# Altium PCB PCB.PcbDoc
Units mm, origin at the board's own origin, x right, y up, seen from the top; angles counter-clockwise.
Board outline 100 x 100 mm, 2 copper layers (Top Layer, Bottom Layer), stack 1.571 mm thick; 55 components, 12 nets, 665 pads, 33 vias.
Unrouted connection lines stored in the file: 4.
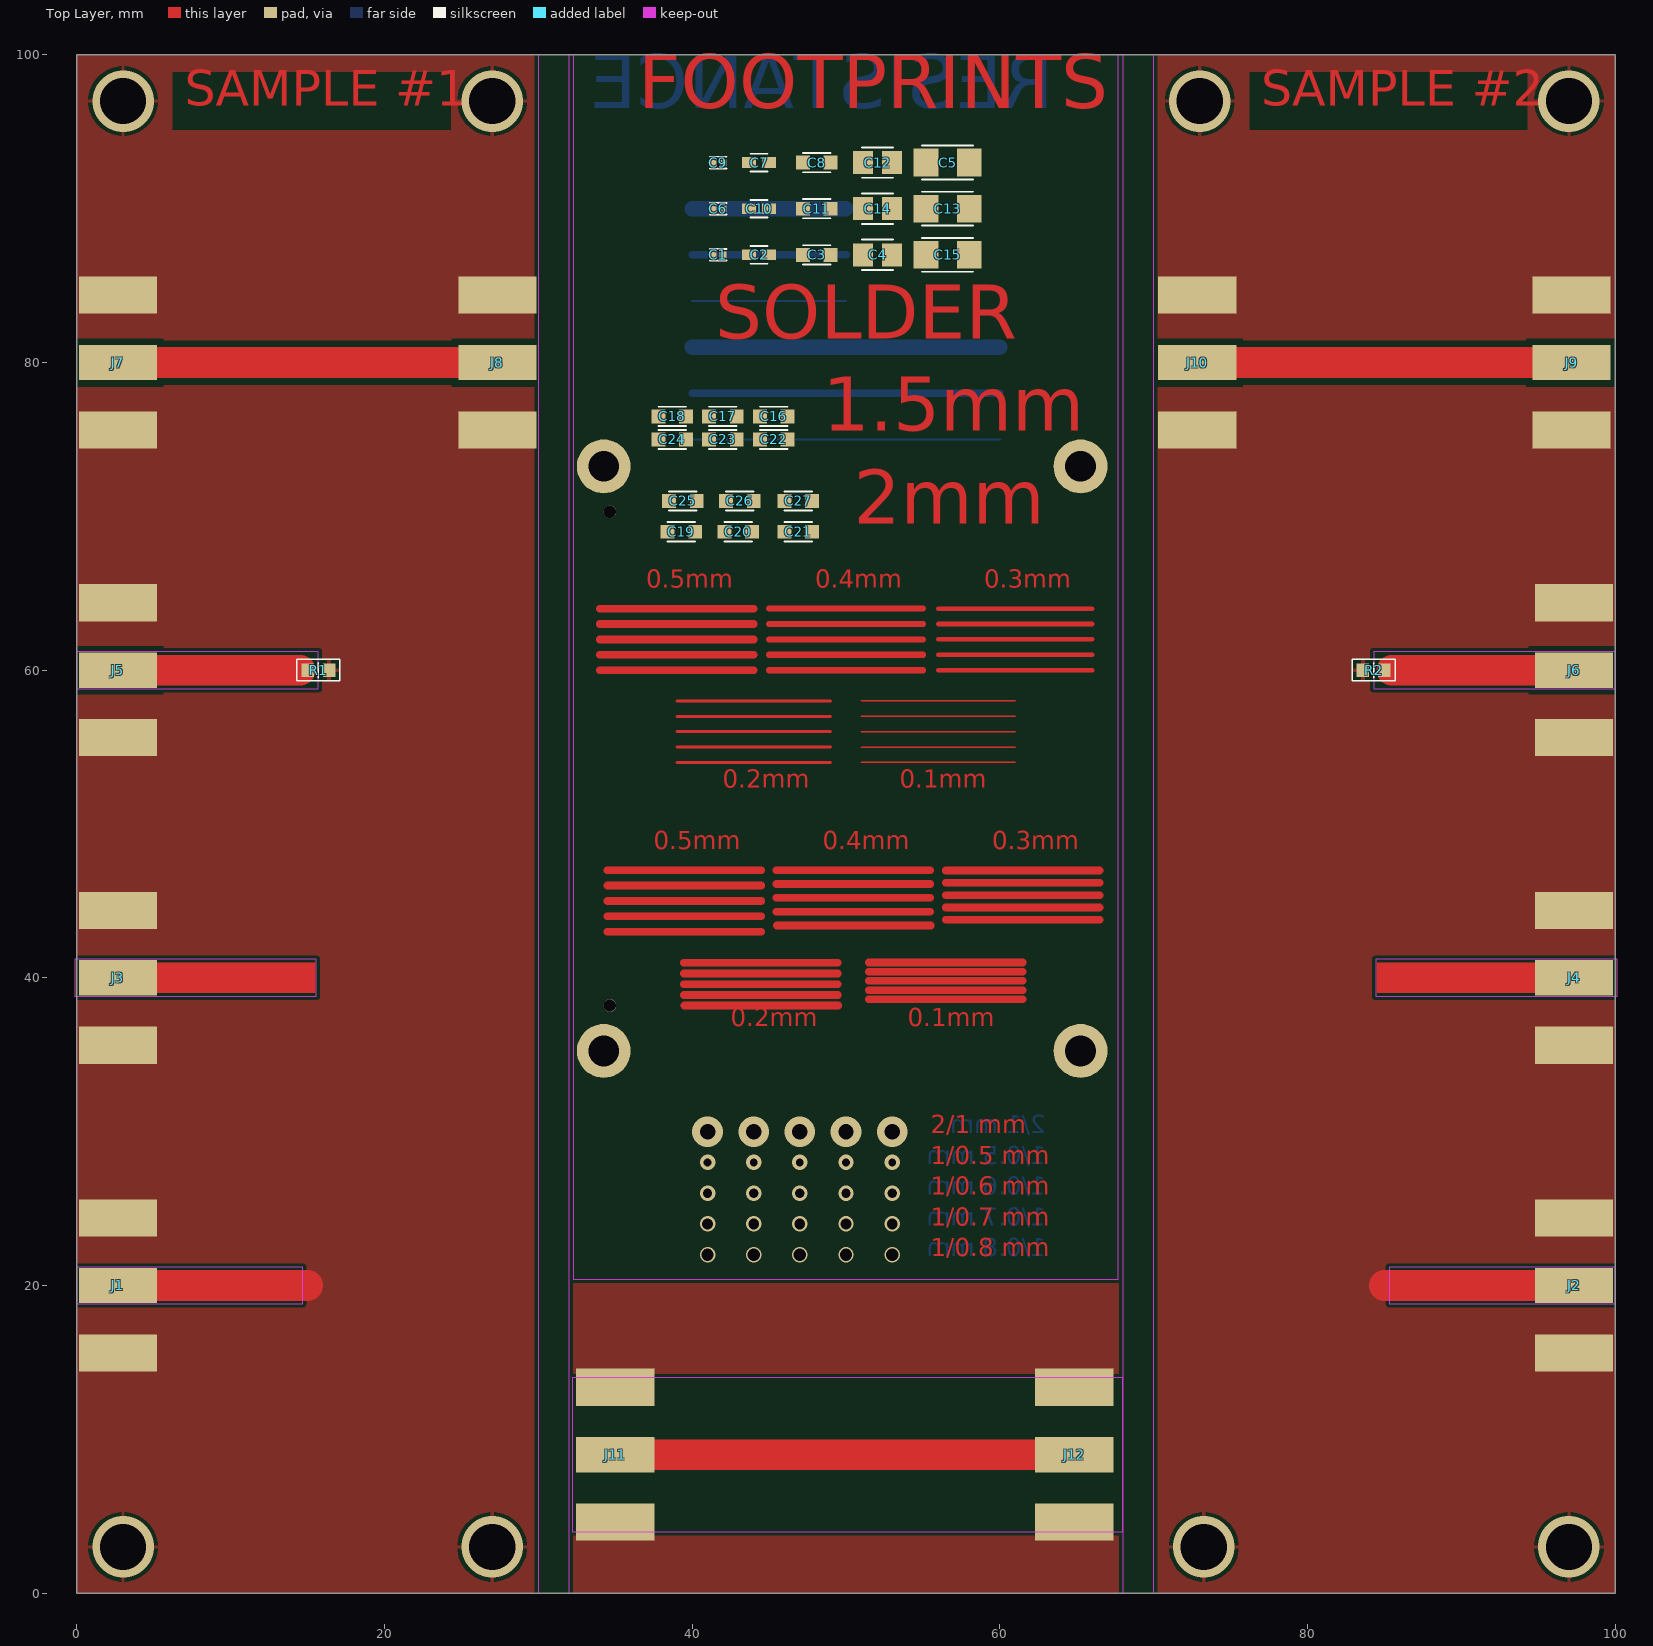
[diagram p0: Top Layer view]
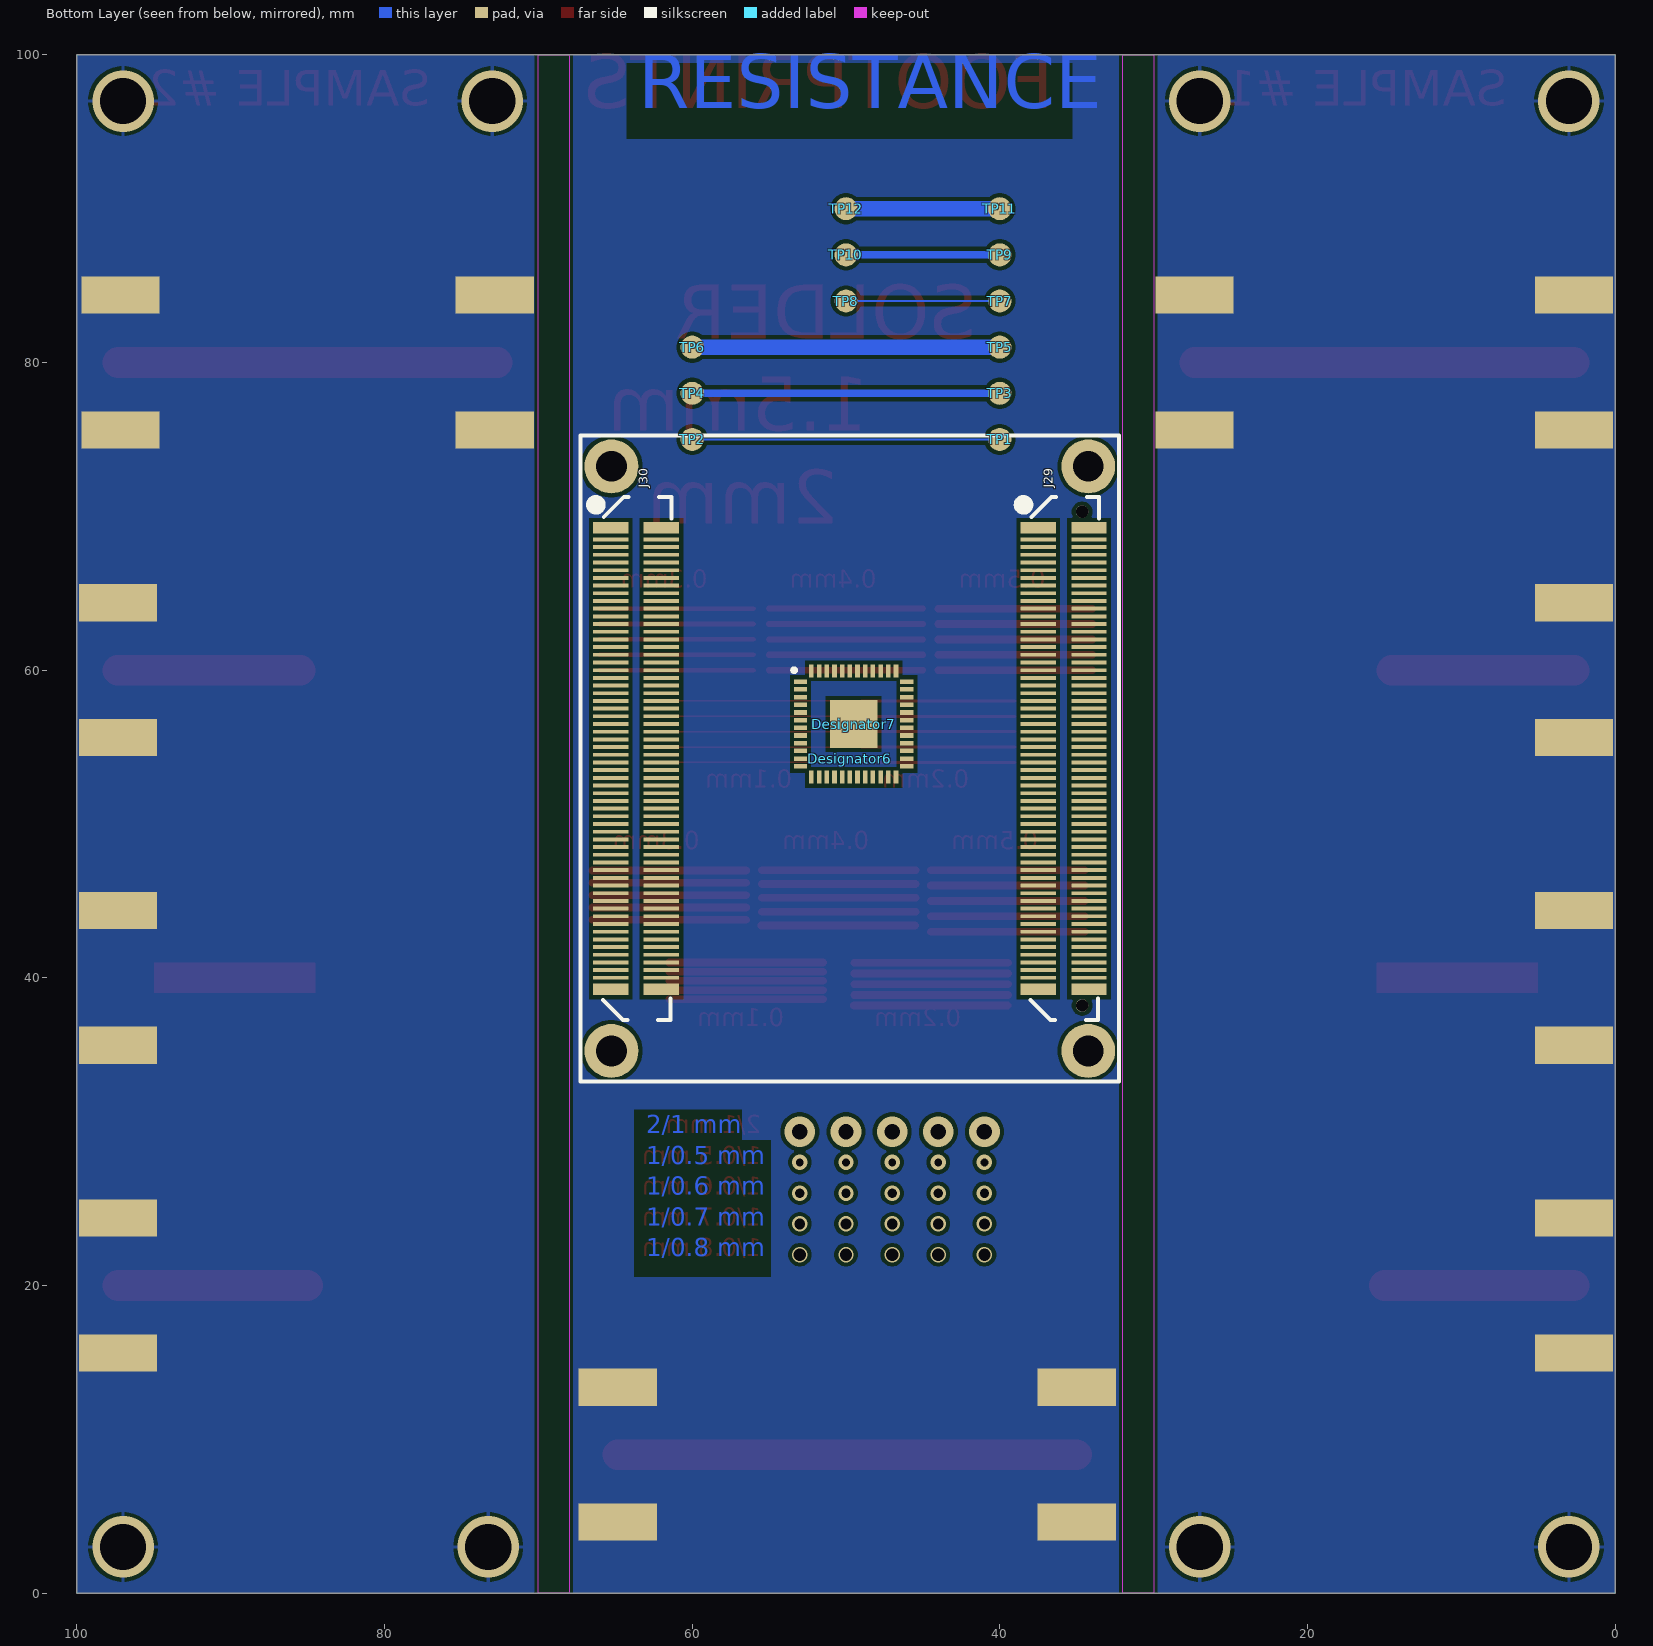
[diagram p1: Bottom Layer view, seen from below]

## Layer stack, top to bottom
Top Solder: solder mask 0.0102, Solder Resist, Dk 3.5
Top Layer: signal copper 0.0356
Core: dielectric 1.5, FR-4, Dk 4
Bottom Layer: signal copper 0.0356
Bottom Solder: solder mask 0.0102, Solder Resist, Dk 3.5

## Board outline
0,0 0,100 100,100 100,0

## Design rules (kind name [scope] priority, off if disabled: settings)
Clearance Clearance_RF [InNetClass('RF') vs InNet('GND')] p1: gap=0.45 ignorepadtopadclearanceinfootprint=FALSE
Clearance [All] p2: gap=0.254 ignorepadtopadclearanceinfootprint=FALSE
PolygonConnect PolygonConnect_RF [InNet('GND') vs HasFootprint('142-0701-851')] p1: connectstyle=Direct reliefconductorwidth=0.254 reliefentries=4 polygonreliefangle="90 Angle" airgapwidth=0.254
PolygonConnect [All] p2: connectstyle=Relief reliefconductorwidth=0.254 reliefentries=4 polygonreliefangle="90 Angle" airgapwidth=0.254
RoutingVias [All] p1: holewidth=0.711 width=1.27 viastyle="Through Hole" minholewidth=0.711 minwidth=1.27 maxholewidth=0.711 maxwidth=1.27
SolderMaskExpansion [All] p1: expansion=0.102 istentingtop=FALSE
SupplyNets "Schematic Supply Nets" [InNet('GND')] p1: voltage=0.000
Width RF [All] p1: maxlimit=2 minlimit=2 preferedwidth=2 impedanceprofiledriven=TRUE impedanceprofileid={2C32BDC9-850F-4FFA-BF8C-7C24DA79BBD3} impedanceprofilevalue=50.000000 minimp=50.000000 maximp=50.000000 favimp=50.000000
Width [All] p2: maxlimit=2 minlimit=0.254 preferedwidth=0.254 minimp=50.000000 maximp=50.000000 favimp=50.000000
30 further rules are at their usual default settings.

## Classes and differential pairs
net class RF: GND NetJ3_1 NetJ4_1 NetJ5_1 NetJ6_1 NetJ7_1 NetJ9_1 NetJ11_1

## Components (designator, comment, footprint, x,y, rotation, side; value= is the part's Value field where it differs from the comment)
C1 "C_0201" C_0201 41.67,87 r0 top
C2 "C_0402" C_0402 44.35,87 r0 top
C3 "C_0603" C_0603 48.1,87 r0 top
C4 "C_0805" C_0805 52.05,87 r0 top
C5 "C_1206" C_1206 56.6,93 r0 top
C6 "C_0201" C_0201 41.67,90 r0 top
C7 "C_0402" C_0402 44.35,93 r0 top
C8 "C_0603" C_0603 48.1,93 r0 top
C9 "C_0201" C_0201 41.67,93 r0 top
C10 "C_0402" C_0402 44.35,90 r0 top
C11 "C_0603" C_0603 48.1,90 r0 top
C12 "C_0805" C_0805 52.05,93 r0 top
C13 "C_1206" C_1206 56.6,90 r0 top
C14 "C_0805" C_0805 52.05,90 r0 top
C15 "C_1206" C_1206 56.6,87 r0 top
C16 "C_0603" C_0603 45.3,76.5 r180 top
C17 "C_0603" C_0603 42,76.5 r180 top
C18 "C_0603" C_0603 38.7,76.5 r180 top
C19 "C_0603" C_0603 39.3,69 r0 top
C20 "C_0603" C_0603 43,69 r0 top
C21 "C_0603" C_0603 46.9,69 r0 top
C22 "C_0603" C_0603 45.3,75 r180 top
C23 "C_0603" C_0603 42,75 r180 top
C24 "C_0603" C_0603 38.7,75 r180 top
C25 "C_0603" C_0603 39.4,71 r0 top
C26 "C_0603" C_0603 43.1,71 r0 top
C27 "C_0603" C_0603 46.9,71 r0 top
Designator6 "Comment" AC7Z020 65.25,35.25 r90 bottom
Designator7 "Comment" QFN50P700X700X100-49N 49.5,56.5 r180 bottom
J1 "142-0701-851" 142-0701-851 2.5,20 r90 top
J2 "142-0701-851" 142-0701-851 97.5,20 r270 top
J3 "142-0701-851" 142-0701-851 2.5,40 r90 top
J4 "142-0701-851" 142-0701-851 97.5,40 r270 top
J5 "142-0701-851" 142-0701-851 2.5,60 r90 top
J6 "142-0701-851" 142-0701-851 97.5,60 r270 top
J7 "142-0701-851" 142-0701-851 2.5,80 r90 top
J8 "142-0701-851" 142-0701-851 27.5,80 r270 top
J9 "142-0701-851" 142-0701-851 97.335,80 r270 top
J10 "142-0701-851" 142-0701-851 72.665,80 r90 top
J11 "142-0701-851" 142-0701-851 34.835,9 r90 top
J12 "142-0701-851" 142-0701-851 65,9 r270 top
R1 "50R 0603" 0603[1608] 15.7,60 r180 top
R2 "50R 0603" 0603[1608] 84.3,60 r0 top
TP1 "Single Pin Test Point" testpoint_SMD 40,75 r180 bottom
TP2 "Single Pin Test Point" testpoint_SMD 60,75 r90 bottom
TP3 "Single Pin Test Point" testpoint_SMD 40,78 r90 bottom
TP4 "Single Pin Test Point" testpoint_SMD 60,78 r90 bottom
TP5 "Single Pin Test Point" testpoint_SMD 40,81 r90 bottom
TP6 "Single Pin Test Point" testpoint_SMD 60,81 r90 bottom
TP7 "Single Pin Test Point" testpoint_SMD 40,84 r90 bottom
TP8 "Single Pin Test Point" testpoint_SMD 50,84 r90 bottom
TP9 "Single Pin Test Point" testpoint_SMD 40,87 r90 bottom
TP10 "Single Pin Test Point" testpoint_SMD 50,87 r90 bottom
TP11 "Single Pin Test Point" testpoint_SMD 40,90 r90 bottom
TP12 "Single Pin Test Point" testpoint_SMD 50,90 r90 bottom

## Footprints (in the part's own frame and the unit in brackets; to place one, negate y for a bottom-side part, rotate by r counter-clockwise, add the part's x,y. Pads: shape width x height; smd on the part's side, far side on the other; paste and mask are expansions set on the pad)
142-0701-851 [mil] "SMA - Edge Launch - Jack (Socket)"
  rect 90x200 smd paste+0 mask+0: 1(0,-6.5)
  rect 95x200 smd paste-100 mask+0: 2(-172.5,-6.5) 3(172.5,-6.5)
  rect 95x200 smd far side paste-100 mask+0: 4(-172.5,-6.5) 5(172.5,-6.5)
  body extent -188,-92 188,470, height 162
0603[1608] [mm] "Chip Capacitor, Body 1.6x0.8mm, IPC High Density"
  rect 0.8x0.9 smd: 1(-0.7,0) 2(0.7,0)
  silkscreen extent -1.4,-0.7 1.4,0.7, body extent -0.79,-0.4 0.81,0.4, height 0.45
AC7Z020 [mm]
  rect 0.75x2.3 smd paste-2.3 mask+0: 1(34,-27.75) 2(34,-31.05) 119(4,-27.75) 120(4,-31.05) 121(34,0.05) 122(34,-3.25) 239(4,0.05) 240(4,-3.25)
  rect 0.25x2.3 smd paste-2.3 mask+0: 3(33.25,-27.75) 4(33.25,-31.05) 5(32.75,-27.75) 6(32.75,-31.05) 7(32.25,-27.75) 8(32.25,-31.05) 9(31.75,-27.75) 10(31.75,-31.05) 11(31.25,-27.75) 12(31.25,-31.05) 13(30.75,-27.75) 14(30.75,-31.05) 15(30.25,-27.75) 16(30.25,-31.05) 17(29.75,-27.75) 18(29.75,-31.05) 19(29.25,-27.75) 20(29.25,-31.05) 21(28.75,-27.75) 22(28.75,-31.05) 23(28.25,-27.75) 24(28.25,-31.05) 25(27.75,-27.75) 26(27.75,-31.05) 27(27.25,-27.75) 28(27.25,-31.05) 29(26.75,-27.75) 30(26.75,-31.05) 31(26.25,-27.75) 32(26.25,-31.05) 33(25.75,-27.75) 34(25.75,-31.05) 35(25.25,-27.75) 36(25.25,-31.05) 37(24.75,-27.75) 38(24.75,-31.05) 39(24.25,-27.75) 40(24.25,-31.05) 41(23.75,-27.75) 42(23.75,-31.05) 43(23.25,-27.75) 44(23.25,-31.05) 45(22.75,-27.75) 46(22.75,-31.05) 47(22.25,-27.75) 48(22.25,-31.05) 49(21.75,-27.75) 50(21.75,-31.05) 51(21.25,-27.75) 52(21.25,-31.05) 53(20.75,-27.75) 54(20.75,-31.05) 55(20.25,-27.75) 56(20.25,-31.05) 57(19.75,-27.75) 58(19.75,-31.05) 59(19.25,-27.75) 60(19.25,-31.05) 61(18.75,-27.75) 62(18.75,-31.05) 63(18.25,-27.75) 64(18.25,-31.05) 65(17.75,-27.75) 66(17.75,-31.05) 67(17.25,-27.75) 68(17.25,-31.05) 69(16.75,-27.75) 70(16.75,-31.05) 71(16.25,-27.75) 72(16.25,-31.05) 73(15.75,-27.75) 74(15.75,-31.05) 75(15.25,-27.75) 76(15.25,-31.05) 77(14.75,-27.75) 78(14.75,-31.05) 79(14.25,-27.75) 80(14.25,-31.05) 81(13.75,-27.75) 82(13.75,-31.05) 83(13.25,-27.75) 84(13.25,-31.05) 85(12.75,-27.75) 86(12.75,-31.05) 87(12.25,-27.75) 88(12.25,-31.05) 89(11.75,-27.75) 90(11.75,-31.05) 91(11.25,-27.75) 92(11.25,-31.05) 93(10.75,-27.75) 94(10.75,-31.05) 95(10.25,-27.75) 96(10.25,-31.05) 97(9.75,-27.75) 98(9.75,-31.05) 99(9.25,-27.75) 100(9.25,-31.05) 101(8.75,-27.75) 102(8.75,-31.05) 103(8.25,-27.75) 104(8.25,-31.05) 105(7.75,-27.75) 106(7.75,-31.05) 107(7.25,-27.75) 108(7.25,-31.05) 109(6.75,-27.75) 110(6.75,-31.05) 111(6.25,-27.75) 112(6.25,-31.05) 113(5.75,-27.75) 114(5.75,-31.05) 115(5.25,-27.75) 116(5.25,-31.05) 117(4.75,-27.75) 118(4.75,-31.05) 123(33.25,0.05) 124(33.25,-3.25) 125(32.75,0.05) 126(32.75,-3.25) 127(32.25,0.05) 128(32.25,-3.25) 129(31.75,0.05) 130(31.75,-3.25) 131(31.25,0.05) 132(31.25,-3.25) 133(30.75,0.05) 134(30.75,-3.25) 135(30.25,0.05) 136(30.25,-3.25) 137(29.75,0.05) 138(29.75,-3.25) 139(29.25,0.05) 140(29.25,-3.25) 141(28.75,0.05) 142(28.75,-3.25) 143(28.25,0.05) 144(28.25,-3.25) 145(27.75,0.05) 146(27.75,-3.25) 147(27.25,0.05) 148(27.25,-3.25) 149(26.75,0.05) 150(26.75,-3.25) 151(26.25,0.05) 152(26.25,-3.25) 153(25.75,0.05) 154(25.75,-3.25) 155(25.25,0.05) 156(25.25,-3.25) 157(24.75,0.05) 158(24.75,-3.25) 159(24.25,0.05) 160(24.25,-3.25) 161(23.75,0.05) 162(23.75,-3.25) 163(23.25,0.05) 164(23.25,-3.25) 165(22.75,0.05) 166(22.75,-3.25) 167(22.25,0.05) 168(22.25,-3.25) 169(21.75,0.05) 170(21.75,-3.25) 171(21.25,0.05) 172(21.25,-3.25) 173(20.75,0.05) 174(20.75,-3.25) 175(20.25,0.05) 176(20.25,-3.25) 177(19.75,0.05) 178(19.75,-3.25) 179(19.25,0.05) 180(19.25,-3.25) 181(18.75,0.05) 182(18.75,-3.25) 183(18.25,0.05) 184(18.25,-3.25) 185(17.75,0.05) 186(17.75,-3.25) 187(17.25,0.05) 188(17.25,-3.25) 189(16.75,0.05) 190(16.75,-3.25) 191(16.25,0.05) 192(16.25,-3.25) 193(15.75,0.05) 194(15.75,-3.25) 195(15.25,0.05) 196(15.25,-3.25) 197(14.75,0.05) 198(14.75,-3.25) 199(14.25,0.05) 200(14.25,-3.25) 201(13.75,0.05) 202(13.75,-3.25) 203(13.25,0.05) 204(13.25,-3.25) 205(12.75,0.05) 206(12.75,-3.25) 207(12.25,0.05) 208(12.25,-3.25) 209(11.75,0.05) 210(11.75,-3.25) 211(11.25,0.05) 212(11.25,-3.25) 213(10.75,0.05) 214(10.75,-3.25) 215(10.25,0.05) 216(10.25,-3.25) 217(9.75,0.05) 218(9.75,-3.25) 219(9.25,0.05) 220(9.25,-3.25) 221(8.75,0.05) 222(8.75,-3.25) 223(8.25,0.05) 224(8.25,-3.25) 225(7.75,0.05) 226(7.75,-3.25) 227(7.25,0.05) 228(7.25,-3.25) 229(6.75,0.05) 230(6.75,-3.25) 231(6.25,0.05) 232(6.25,-3.25) 233(5.75,0.05) 234(5.75,-3.25) 235(5.25,0.05) 236(5.25,-3.25) 237(4.75,0.05) 238(4.75,-3.25)
  round 3.5 hole 2 paste-2539.97 mask+0: MTH(0,-31) MTH(0,0) MTH(38,-31) MTH(38,0)
  rect 0.35x1.55 on Bottom Paste mask-1.55: Un5(4.19,0.05) Un6(4.19,-3.25) Un7(4.19,-27.75) Un8(4.19,-31.05) Un241(33.81,0.05) Un242(33.81,-3.25) Un243(33.81,-27.75) Un244(33.81,-31.05)
  rect 0.23x1.55 on Bottom Paste mask-1.55: Un9(4.75,0.05) Un10(4.75,-3.25) Un11(4.75,-27.75) Un12(4.75,-31.05) Un13(5.25,0.05) Un14(5.25,-3.25) Un15(5.25,-27.75) Un16(5.25,-31.05) Un17(5.75,0.05) Un18(5.75,-3.25) Un19(5.75,-27.75) Un20(5.75,-31.05) Un21(6.25,0.05) Un22(6.25,-3.25) Un23(6.25,-27.75) Un24(6.25,-31.05) Un25(6.75,0.05) Un26(6.75,-3.25) Un27(6.75,-27.75) Un28(6.75,-31.05) Un29(7.25,0.05) Un30(7.25,-3.25) Un31(7.25,-27.75) Un32(7.25,-31.05) Un33(7.75,0.05) Un34(7.75,-3.25) Un35(7.75,-27.75) Un36(7.75,-31.05) Un37(8.25,0.05) Un38(8.25,-3.25) Un39(8.25,-27.75) Un40(8.25,-31.05) Un41(8.75,0.05) Un42(8.75,-3.25) Un43(8.75,-27.75) Un44(8.75,-31.05) Un45(9.25,0.05) Un46(9.25,-3.25) Un47(9.25,-27.75) Un48(9.25,-31.05) Un49(9.75,0.05) Un50(9.75,-3.25) Un51(9.75,-27.75) Un52(9.75,-31.05) Un53(10.25,0.05) Un54(10.25,-3.25) Un55(10.25,-27.75) Un56(10.25,-31.05) Un57(10.75,0.05) Un58(10.75,-3.25) Un59(10.75,-27.75) Un60(10.75,-31.05) Un61(11.25,0.05) Un62(11.25,-3.25) Un63(11.25,-27.75) Un64(11.25,-31.05) Un65(11.75,0.05) Un66(11.75,-3.25) Un67(11.75,-27.75) Un68(11.75,-31.05) Un69(12.25,0.05) Un70(12.25,-3.25) Un71(12.25,-27.75) Un72(12.25,-31.05) Un73(12.75,0.05) Un74(12.75,-3.25) Un75(12.75,-27.75) Un76(12.75,-31.05) Un77(13.25,0.05) Un78(13.25,-3.25) Un79(13.25,-27.75) Un80(13.25,-31.05) Un81(13.75,0.05) Un82(13.75,-3.25) Un83(13.75,-27.75) Un84(13.75,-31.05) Un85(14.25,0.05) Un86(14.25,-3.25) Un87(14.25,-27.75) Un88(14.25,-31.05) Un89(14.75,0.05) Un90(14.75,-3.25) Un91(14.75,-27.75) Un92(14.75,-31.05) Un93(15.25,0.05) Un94(15.25,-3.25) Un95(15.25,-27.75) Un96(15.25,-31.05) Un97(15.75,0.05) Un98(15.75,-3.25) Un99(15.75,-27.75) Un100(15.75,-31.05) Un101(16.25,0.05) Un102(16.25,-3.25) Un103(16.25,-27.75) Un104(16.25,-31.05) Un105(16.75,0.05) Un106(16.75,-3.25) Un107(16.75,-27.75) Un108(16.75,-31.05) Un109(17.25,0.05) Un110(17.25,-3.25) Un111(17.25,-27.75) Un112(17.25,-31.05) Un113(17.75,0.05) Un114(17.75,-3.25) Un115(17.75,-27.75) Un116(17.75,-31.05) Un117(18.25,0.05) Un118(18.25,-3.25) Un119(18.25,-27.75) Un120(18.25,-31.05) Un121(18.75,0.05) Un122(18.75,-3.25) Un123(18.75,-27.75) Un124(18.75,-31.05) Un125(19.25,0.05) Un126(19.25,-3.25) Un127(19.25,-27.75) Un128(19.25,-31.05) Un129(19.75,0.05) Un130(19.75,-3.25) Un131(19.75,-27.75) Un132(19.75,-31.05) Un133(20.25,0.05) Un134(20.25,-3.25) Un135(20.25,-27.75) Un136(20.25,-31.05) Un137(20.75,0.05) Un138(20.75,-3.25) Un139(20.75,-27.75) Un140(20.75,-31.05) Un141(21.25,0.05) Un142(21.25,-3.25) Un143(21.25,-27.75) Un144(21.25,-31.05) Un145(21.75,0.05) Un146(21.75,-3.25) Un147(21.75,-27.75) Un148(21.75,-31.05) Un149(22.25,0.05) Un150(22.25,-3.25) Un151(22.25,-27.75) Un152(22.25,-31.05) Un153(22.75,0.05) Un154(22.75,-3.25) Un155(22.75,-27.75) Un156(22.75,-31.05) Un157(23.25,0.05) Un158(23.25,-3.25) Un159(23.25,-27.75) Un160(23.25,-31.05) Un161(23.75,0.05) Un162(23.75,-3.25) Un163(23.75,-27.75) Un164(23.75,-31.05) Un165(24.25,0.05) Un166(24.25,-3.25) Un167(24.25,-27.75) Un168(24.25,-31.05) Un169(24.75,0.05) Un170(24.75,-3.25) Un171(24.75,-27.75) Un172(24.75,-31.05) Un173(25.25,0.05) Un174(25.25,-3.25) Un175(25.25,-27.75) Un176(25.25,-31.05) Un177(25.75,0.05) Un178(25.75,-3.25) Un179(25.75,-27.75) Un180(25.75,-31.05) Un181(26.25,0.05) Un182(26.25,-3.25) Un183(26.25,-27.75) Un184(26.25,-31.05) Un185(26.75,0.05) Un186(26.75,-3.25) Un187(26.75,-27.75) Un188(26.75,-31.05) Un189(27.25,0.05) Un190(27.25,-3.25) Un191(27.25,-27.75) Un192(27.25,-31.05) Un193(27.75,0.05) Un194(27.75,-3.25) Un195(27.75,-27.75) Un196(27.75,-31.05) Un197(28.25,0.05) Un198(28.25,-3.25) Un199(28.25,-27.75) Un200(28.25,-31.05) Un201(28.75,0.05) Un202(28.75,-3.25) Un203(28.75,-27.75) Un204(28.75,-31.05) Un205(29.25,0.05) Un206(29.25,-3.25) Un207(29.25,-27.75) Un208(29.25,-31.05) Un209(29.75,0.05) Un210(29.75,-3.25) Un211(29.75,-27.75) Un212(29.75,-31.05) Un213(30.25,0.05) Un214(30.25,-3.25) Un215(30.25,-27.75) Un216(30.25,-31.05) Un217(30.75,0.05) Un218(30.75,-3.25) Un219(30.75,-27.75) Un220(30.75,-31.05) Un221(31.25,0.05) Un222(31.25,-3.25) Un223(31.25,-27.75) Un224(31.25,-31.05) Un225(31.75,0.05) Un226(31.75,-3.25) Un227(31.75,-27.75) Un228(31.75,-31.05) Un229(32.25,0.05) Un230(32.25,-3.25) Un231(32.25,-27.75) Un232(32.25,-31.05) Un233(32.75,0.05) Un234(32.75,-3.25) Un235(32.75,-27.75) Un236(32.75,-31.05) Un237(33.25,0.05) Un238(33.25,-3.25) Un239(33.25,-27.75) Un240(33.25,-31.05)
  round 0.81 hole 0.81 unplated: ""(2.95,-30.6) ""(35.05,-30.6)
  silkscreen extent -2,-33 40,2, body extent 2.4,-31.7 35.6,0.7, height 2.4
C_0201 [mm] "Capacitor 0201"
  rect 0.46x0.42 smd: 1(-0.33,0) 2(0.33,0)
  silkscreen extent -0.52,-0.38 0.58,0.38, body extent -0.3,-0.15 0.3,0.15, height 0.33
C_0402 [mm] "Capacitor 0402"
  rect 0.9x0.7 smd: 1(-0.65,0) 2(0.65,0)
  silkscreen extent -0.55,-0.58 0.55,0.58, body extent -0.5,-0.25 0.5,0.25, height 0.5
C_0603 [mm] "Capacitor 0603"
  rect 0.9x0.9 smd: 1(-0.9,0) 2(0.9,0)
  silkscreen extent -0.9,-0.63 0.9,0.63, body extent -0.8,-0.4 0.8,0.4, height 0.9
C_0805 [mm]
  rect 1.3x1.5 smd: 1(-0.95,0) 2(0.95,0)
  silkscreen extent -1,-0.99 1,0.99, body extent -1,-0.63 1,0.62, height 0.6
C_1206 [mm]
  rect 1.6x1.8 smd: 1(-1.4,0) 2(1.4,0)
  silkscreen extent -1.68,-1.1 1.68,1.1, body extent -1.6,-0.8 1.6,0.8, height 1
QFN50P700X700X100-49N [mm]
  rect 0.85x0.3 smd: 1(-3.45,2.75) 2(-3.45,2.25) 3(-3.45,1.75) 4(-3.45,1.25) 5(-3.45,0.75) 6(-3.45,0.25) 7(-3.45,-0.25) 8(-3.45,-0.75) 9(-3.45,-1.25) 10(-3.45,-1.75) 11(-3.45,-2.25) 12(-3.45,-2.75) 25(3.45,-2.75) 26(3.45,-2.25) 27(3.45,-1.75) 28(3.45,-1.25) 29(3.45,-0.75) 30(3.45,-0.25) 31(3.45,0.25) 32(3.45,0.75) 33(3.45,1.25) 34(3.45,1.75) 35(3.45,2.25) 36(3.45,2.75)
  rect 0.3x0.85 smd: 13(-2.75,-3.45) 14(-2.25,-3.45) 15(-1.75,-3.45) 16(-1.25,-3.45) 17(-0.75,-3.45) 18(-0.25,-3.45) 19(0.25,-3.45) 20(0.75,-3.45) 21(1.25,-3.45) 22(1.75,-3.45) 23(2.25,-3.45) 24(2.75,-3.45) 37(2.75,3.45) 38(2.25,3.45) 39(1.75,3.45) 40(1.25,3.45) 41(0.75,3.45) 42(0.25,3.45) 43(-0.25,3.45) 44(-0.75,3.45) 45(-1.25,3.45) 46(-1.75,3.45) 47(-2.25,3.45) 48(-2.75,3.45)
  rect 3.1x3.1 smd: 49(0,0)
  silkscreen extent -4,3.38 -3.75,3.62, body extent -3.55,-3.55 3.55,3.55, height 1
testpoint_SMD [mm]
  round 1.5 smd: 0(0,0)

## Part data
C1 C2 C3 C4 C5 C6 C7 C8 C9 C10 C11 C12 C13 C14 C15 C16 C17 C18 C19 C20 C21 C22 C23 C24 C25 C26 C27: library part Cap, "Capacitor", ComponentLink1Description=Datasheet, ComponentLink2Description=SupplierLink
J1 J2 J3 J4 J5 J6 J7 J8 J9 J10 J11 J12: "SMA - Edge Launch - Jack (Socket)", ComponentLink1Description=Mouser, ComponentLink1URL=https://ar.mouser.com/ProductDetail/Johnson-Cinch-Connectivity-Solutions/142-0701-851?qs=iKljIZI%252Bxs62lAzRMYOufA%3D%3D, ComponentLink2Description=Datasheet, ComponentLink2URL=https://ar.mouser.com/datasheet/2/643/pi-CCS-JOHN-142-0701-851-1290383.pdf, MPN=142-0701-851
R1 R2: library part Res, "Resistor", ComponentLink1Description=Datasheet, ComponentLink2Description=SupplierLink
TP1 TP2 TP3 TP4 TP5 TP6 TP7 TP8 TP9 TP10 TP11 TP12: library part Testpoint, ComponentLink1Description=Datasheet, ComponentLink2Description=SupplierLink

## Via types
v1: diameter 4, hole 3, Top Layer to Bottom Layer, 8 vias
v2: diameter 1, hole 0.8, Top Layer to Bottom Layer, 5 vias
v3: diameter 1, hole 0.7, Top Layer to Bottom Layer, 5 vias
v4: diameter 1, hole 0.6, Top Layer to Bottom Layer, 5 vias
v5: diameter 1, hole 0.5, Top Layer to Bottom Layer, 5 vias
v6: diameter 2, hole 1, Top Layer to Bottom Layer, 5 vias

## Nets (pads, with @x,y where several pads share a name; then routed paths per layer and width w, separated by ;. In a path a pad name is that pad's centre, name@x,y a point inside that pad or via, vN(x,y) a via of type N, cw(c..) or ccw(c..) an arc to the next point about the centre after c; other vN are vias at no path point)
GND: J1.1 J1.2 J1.3 J1.4 J1.5 J2.1 J2.2 J2.3 J2.4 J2.5 J3.2 J3.3 J3.4 J3.5 J4.2 J4.3 J4.4 J4.5 J5.2 J5.3 J5.4 J5.5 J6.2 J6.3 J6.4 J6.5 J7.2 J7.3 J7.4 J7.5 J8.2 J8.3 J8.4 J8.5 J9.2 J9.3 J9.4 J9.5 J10.2 J10.3 J10.4 J10.5 J11.2 J11.3 J11.4 J11.5 J12.2 J12.3 J12.4 J12.5 R1.1 R2.1 | length 24.7
  Top Layer w2: J1.1 15,20 ; 85,20 J2.1
  other v1: 3,3 27,3 73.259,3 97,3 3,97 27,97 73,97 97,97
NetJ5_1: J5.1 R1.2 | length 11.8
  Top Layer w2: J5.1 14.5,60
NetJ6_1: J6.1 R2.2 | length 11.8
  Top Layer w2: 85.5,60 J6.1
NetJ7_1: J7.1 J8.1 | length 24.7
  Top Layer w2: J7.1 J8.1
NetJ9_1: J9.1 J10.1 | length 24.7
  Top Layer w2: J10.1@72.665,80 J9.1@97.335,80
NetJ11_1: J11.1 J12.1 | length 29.8
  Top Layer w2: J11.1 J12.1
NetTP1_0: TP1.0 TP2.0 | length 20
  Bottom Layer w0.15: TP1.0 TP2.0
NetTP3_0: TP3.0 TP4.0 | length 20
  Bottom Layer w0.5: TP3.0 TP4.0
NetTP5_0: TP5.0 TP6.0 | length 20
  Bottom Layer w1: TP5.0 TP6.0
NetTP7_0: TP7.0 TP8.0 | length 10
  Bottom Layer w0.15: TP7.0 TP8.0
NetTP9_0: TP9.0 TP10.0 | length 10
  Bottom Layer w0.5: TP9.0 TP10.0
NetTP11_0: TP11.0 TP12.0 | length 10
  Bottom Layer w1: TP11.0 TP12.0
pads on no net: C1.1 C1.2 C2.1 C2.2 C3.1 C3.2 C4.1 C4.2 C5.1 C5.2 C6.1 C6.2 C7.1 C7.2 C8.1 C8.2 C9.1 C9.2 C10.1 C10.2 C11.1 C11.2 C12.1 C12.2 C13.1 C13.2 C14.1 C14.2 C15.1 C15.2 C16.1 C16.2 C17.1 C17.2 C18.1 C18.2 C19.1 C19.2 C20.1 C20.2 C21.1 C21.2 C22.1 C22.2 C23.1 C23.2 C24.1 C24.2 C25.1 C25.2 C26.1 C26.2 C27.1 C27.2 Designator6. Designator6.1 Designator6.2 Designator6.3 Designator6.4 Designator6.5 Designator6.6 Designator6.7 Designator6.8 Designator6.9 Designator6.10 Designator6.11 Designator6.12 Designator6.13 Designator6.14 Designator6.15 Designator6.16 Designator6.17 Designator6.18 Designator6.19 Designator6.20 Designator6.21 Designator6.22 Designator6.23 Designator6.24 Designator6.25 Designator6.26 Designator6.27 Designator6.28 Designator6.29 Designator6.30 Designator6.31 Designator6.32 Designator6.33 Designator6.34 Designator6.35 Designator6.36 Designator6.37 Designator6.38 Designator6.39 Designator6.40 Designator6.41 Designator6.42 Designator6.43 Designator6.44 Designator6.45 Designator6.46 Designator6.47 Designator6.48 Designator6.49 Designator6.50 Designator6.51 Designator6.52 Designator6.53 Designator6.54 Designator6.55 Designator6.56 Designator6.57 Designator6.58 Designator6.59 Designator6.60 Designator6.61 Designator6.62 Designator6.63 Designator6.64 Designator6.65 Designator6.66 Designator6.67 Designator6.68 Designator6.69 Designator6.70 Designator6.71 Designator6.72 Designator6.73 Designator6.74 Designator6.75 Designator6.76 Designator6.77 Designator6.78 Designator6.79 Designator6.80 Designator6.81 Designator6.82 Designator6.83 Designator6.84 Designator6.85 Designator6.86 Designator6.87 Designator6.88 Designator6.89 Designator6.90 Designator6.91 Designator6.92 Designator6.93 Designator6.94 Designator6.95 Designator6.96 Designator6.97 Designator6.98 Designator6.99 Designator6.100 Designator6.101 Designator6.102 Designator6.103 Designator6.104 Designator6.105 Designator6.106 Designator6.107 Designator6.108 Designator6.109 Designator6.110 Designator6.111 Designator6.112 Designator6.113 Designator6.114 Designator6.115 Designator6.116 Designator6.117 Designator6.118 Designator6.119 Designator6.120 Designator6.121 Designator6.122 Designator6.123 Designator6.124 Designator6.125 Designator6.126 Designator6.127 Designator6.128 Designator6.129 Designator6.130 Designator6.131 Designator6.132 Designator6.133 Designator6.134 Designator6.135 Designator6.136 Designator6.137 Designator6.138 Designator6.139 Designator6.140 Designator6.141 Designator6.142 Designator6.143 Designator6.144 Designator6.145 Designator6.146 Designator6.147 Designator6.148 Designator6.149 Designator6.150 Designator6.151 Designator6.152 Designator6.153 Designator6.154 Designator6.155 Designator6.156 Designator6.157 Designator6.158 Designator6.159 Designator6.160 Designator6.161 Designator6.162 Designator6.163 Designator6.164 Designator6.165 Designator6.166 Designator6.167 Designator6.168 Designator6.169 Designator6.170 Designator6.171 Designator6.172 Designator6.173 Designator6.174 Designator6.175 Designator6.176 Designator6.177 Designator6.178 Designator6.179 Designator6.180 Designator6.181 Designator6.182 Designator6.183 Designator6.184 Designator6.185 Designator6.186 Designator6.187 Designator6.188 Designator6.189 Designator6.190 Designator6.191 Designator6.192 Designator6.193 Designator6.194 Designator6.195 Designator6.196 Designator6.197 Designator6.198 Designator6.199 Designator6.200 Designator6.201 Designator6.202 Designator6.203 Designator6.204 Designator6.205 Designator6.206 Designator6.207 Designator6.208 Designator6.209 Designator6.210 Designator6.211 Designator6.212 Designator6.213 Designator6.214 Designator6.215 Designator6.216 Designator6.217 Designator6.218 Designator6.219 Designator6.220 Designator6.221 Designator6.222 Designator6.223 Designator6.224 Designator6.225 Designator6.226 Designator6.227 Designator6.228 Designator6.229 Designator6.230 Designator6.231 Designator6.232 Designator6.233 Designator6.234 Designator6.235 Designator6.236 Designator6.237 Designator6.238 Designator6.239 Designator6.240 Designator6.MTH Designator6.Un5 Designator6.Un6 Designator6.Un7 Designator6.Un8 Designator6.Un9 Designator6.Un10 Designator6.Un11 Designator6.Un12 Designator6.Un13 Designator6.Un14 Designator6.Un15 Designator6.Un16 Designator6.Un17 Designator6.Un18 Designator6.Un19 Designator6.Un20 Designator6.Un21 Designator6.Un22 Designator6.Un23 Designator6.Un24 Designator6.Un25 Designator6.Un26 Designator6.Un27 Designator6.Un28 Designator6.Un29 Designator6.Un30 Designator6.Un31 Designator6.Un32 Designator6.Un33 Designator6.Un34 Designator6.Un35 Designator6.Un36 Designator6.Un37 Designator6.Un38 Designator6.Un39 Designator6.Un40 Designator6.Un41 Designator6.Un42 Designator6.Un43 Designator6.Un44 Designator6.Un45 Designator6.Un46 Designator6.Un47 Designator6.Un48 Designator6.Un49 Designator6.Un50 Designator6.Un51 Designator6.Un52 Designator6.Un53 Designator6.Un54 Designator6.Un55 Designator6.Un56 Designator6.Un57 Designator6.Un58 Designator6.Un59 Designator6.Un60 Designator6.Un61 Designator6.Un62 Designator6.Un63 Designator6.Un64 Designator6.Un65 Designator6.Un66 Designator6.Un67 Designator6.Un68 Designator6.Un69 Designator6.Un70 Designator6.Un71 Designator6.Un72 Designator6.Un73 Designator6.Un74 Designator6.Un75 Designator6.Un76 Designator6.Un77 Designator6.Un78 Designator6.Un79 Designator6.Un80 Designator6.Un81 Designator6.Un82 Designator6.Un83 Designator6.Un84 Designator6.Un85 Designator6.Un86 Designator6.Un87 Designator6.Un88 Designator6.Un89 Designator6.Un90 Designator6.Un91 Designator6.Un92 Designator6.Un93 Designator6.Un94 Designator6.Un95 Designator6.Un96 Designator6.Un97 Designator6.Un98 Designator6.Un99 Designator6.Un100 Designator6.Un101 Designator6.Un102 Designator6.Un103 Designator6.Un104 Designator6.Un105 Designator6.Un106 Designator6.Un107 Designator6.Un108 Designator6.Un109 Designator6.Un110 Designator6.Un111 Designator6.Un112 Designator6.Un113 Designator6.Un114 Designator6.Un115 Designator6.Un116 Designator6.Un117 Designator6.Un118 Designator6.Un119 Designator6.Un120 Designator6.Un121 Designator6.Un122 Designator6.Un123 Designator6.Un124 Designator6.Un125 Designator6.Un126 Designator6.Un127 Designator6.Un128 Designator6.Un129 Designator6.Un130 Designator6.Un131 Designator6.Un132 Designator6.Un133 Designator6.Un134 Designator6.Un135 Designator6.Un136 Designator6.Un137 Designator6.Un138 Designator6.Un139 Designator6.Un140 Designator6.Un141 Designator6.Un142 Designator6.Un143 Designator6.Un144 Designator6.Un145 Designator6.Un146 Designator6.Un147 Designator6.Un148 Designator6.Un149 Designator6.Un150 Designator6.Un151 Designator6.Un152 Designator6.Un153 Designator6.Un154 Designator6.Un155 Designator6.Un156 Designator6.Un157 Designator6.Un158 Designator6.Un159 Designator6.Un160 Designator6.Un161 Designator6.Un162 Designator6.Un163 Designator6.Un164 Designator6.Un165 Designator6.Un166 Designator6.Un167 Designator6.Un168 Designator6.Un169 Designator6.Un170 Designator6.Un171 Designator6.Un172 Designator6.Un173 Designator6.Un174 Designator6.Un175 Designator6.Un176 Designator6.Un177 Designator6.Un178 Designator6.Un179 Designator6.Un180 Designator6.Un181 Designator6.Un182 Designator6.Un183 Designator6.Un184 Designator6.Un185 Designator6.Un186 Designator6.Un187 Designator6.Un188 Designator6.Un189 Designator6.Un190 Designator6.Un191 Designator6.Un192 Designator6.Un193 Designator6.Un194 Designator6.Un195 Designator6.Un196 Designator6.Un197 Designator6.Un198 Designator6.Un199 Designator6.Un200 Designator6.Un201 Designator6.Un202 Designator6.Un203 Designator6.Un204 Designator6.Un205 Designator6.Un206 Designator6.Un207 Designator6.Un208 Designator6.Un209 Designator6.Un210 Designator6.Un211 Designator6.Un212 Designator6.Un213 Designator6.Un214 Designator6.Un215 Designator6.Un216 Designator6.Un217 Designator6.Un218 Designator6.Un219 Designator6.Un220 Designator6.Un221 Designator6.Un222 Designator6.Un223 Designator6.Un224 Designator6.Un225 Designator6.Un226 Designator6.Un227 Designator6.Un228 Designator6.Un229 Designator6.Un230 Designator6.Un231 Designator6.Un232 Designator6.Un233 Designator6.Un234 Designator6.Un235 Designator6.Un236 Designator6.Un237 Designator6.Un238 Designator6.Un239 Designator6.Un240 Designator6.Un241 Designator6.Un242 Designator6.Un243 Designator6.Un244 Designator7.1 Designator7.2 Designator7.3 Designator7.4 Designator7.5 Designator7.6 Designator7.7 Designator7.8 Designator7.9 Designator7.10 Designator7.11 Designator7.12 Designator7.13 Designator7.14 Designator7.15 Designator7.16 Designator7.17 Designator7.18 Designator7.19 Designator7.20 Designator7.21 Designator7.22 Designator7.23 Designator7.24 Designator7.25 Designator7.26 Designator7.27 Designator7.28 Designator7.29 Designator7.30 Designator7.31 Designator7.32 Designator7.33 Designator7.34 Designator7.35 Designator7.36 Designator7.37 Designator7.38 Designator7.39 Designator7.40 Designator7.41 Designator7.42 Designator7.43 Designator7.44 Designator7.45 Designator7.46 Designator7.47 Designator7.48 Designator7.49 J3.1 J4.1
copper on no net: | length 500
  Top Layer w0.1: 51,54 61,54 ; 51,55 61,55 ; 51,56 61,56 ; 51,57 61,57 ; 51,58 61,58
  Top Layer w0.2: 39,54 49,54 ; 39,55 49,55 ; 39,56 49,56 ; 39,57 49,57 ; 39,58 49,58
  Top Layer w0.3: 56,60 66,60 ; 56,61 66,61 ; 56,62 66,62 ; 56,63 66,63 ; 56,64 66,64
  Top Layer w0.4: 45,60 55,60 ; 45,61 55,61 ; 45,62 55,62 ; 45,63 55,63 ; 45,64 55,64
  Top Layer w0.5: 34,60 44,60 ; 34,61 44,61 ; 34,62 44,62 ; 34,63 44,63 ; 34,64 44,64 ; 34.5,43 44.5,43 ; 34.5,44 44.5,44 ; 34.5,45 44.5,45 ; 34.5,46 44.5,46 ; 34.5,47 44.5,47 ; 39.466,38.882 49.466,38.882 ; 39.466,39.582 49.466,39.582 ; 39.466,40.282 49.466,40.282 ; 39.466,40.982 49.466,40.982 ; 39.5,38.2 49.5,38.2 ; 45.48,44.3 55.48,44.3 ; 45.48,45.2 55.48,45.2 ; 45.48,46.1 55.48,46.1 ; 45.48,47 55.48,47 ; 45.513,43.4 55.513,43.4 ; 51.5,38.6 61.5,38.6 ; 51.5,39.2 61.5,39.2 ; 51.5,39.8 61.5,39.8 ; 51.5,40.4 61.5,40.4 ; 51.5,41 61.5,41 ; 56.478,44.576 66.478,44.576 ; 56.478,45.376 66.478,45.376 ; 56.478,46.176 66.478,46.176 ; 56.478,46.976 66.478,46.976 ; 56.504,43.775 66.504,43.775
  other v2: 41,22 44,22 47,22 50,22 53,22
  other v3: 41,24 44,24 47,24 50,24 53,24
  other v4: 41,26 44,26 47,26 50,26 53,26
  other v5: 41,28 44,28 47,28 50,28 53,28
  other v6: 41,30 44,30 47,30 50,30 53,30

## Polygon pours and split planes (outlines as drawn)
GND on Bottom Layer "NONET_L-01_P-001" (solid, pour order 0): 0,0 100,0 100,100 0,100
GND on Top Layer "NONET_L-01_P-001" (solid, pour order 1): 0,0 100,0 100,100 0,100

## Keep-outs
Top Layer:
  rectangle: 32.259,20.4 67.7,100
  region: 100.127,41.2 84.427,41.2 84.427,38.8 100.127,38.8
  region: 100,21.2 85.325,21.2 85.325,18.8 100,18.8
  region: 100,61.2 84.3,61.2 84.3,58.8 100,58.8
  rectangle: 32.208,4 68,14
  rectangle: 30,0 32,100
  region: 70,100 68,100 68,0 70,0
  rectangle: 0,18.8 14.675,21.2
  rectangle: -0.127,38.8 15.573,41.2
  rectangle: 0,58.8 15.7,61.2
Bottom Layer:
  region: 70,100 68,100 68,0 70,0
  rectangle: 30,0 32,100

## Other copper
Top Layer:
  region: 95,41 84.5,41 84.5,39 95,39
  rectangle: 5,39 15.5,41
  text "SAMPLE #1" at 7,95.911 h4
  text "SAMPLE #2" at 77,95.911 h4
  text "FOOTPRINTS" at 36.5,95.367 h6
  text "SOLDER" at 41.5,80.367 h6
  text "1.5mm" at 48.5,74.384 h6
  text "2mm" at 50.5,68.339 h6
  text "0.5mm" at 37,64.956 h2
  text "0.4mm" at 48,64.956 h2
  text "0.3mm" at 59,64.956 h2
  text "0.2mm" at 42,51.956 h2
  text "0.1mm" at 53.5,51.956 h2
  text "0.5mm" at 37.5,47.956 h2
  text "0.4mm" at 48.5,47.956 h2
  text "0.3mm" at 59.5,47.956 h2
  text "0.2mm" at 42.5,36.456 h2
  text "0.1mm" at 54,36.456 h2
  text "2/1 mm" at 55.5,29.501 h2
  text "1/0.5 mm" at 55.5,27.501 h2
  text "1/0.6 mm" at 55.5,25.501 h2
  text "1/0.7 mm" at 55.5,23.501 h2
  text "1/0.8 mm" at 55.5,21.501 h2
Bottom Layer:
  text "RESISTANCE" at 63.5,95.367 h6
  text "2/1 mm" at 63,29.501 h2
  text "1/0.5 mm" at 63,27.501 h2
  text "1/0.6 mm" at 63,25.501 h2
  text "1/0.7 mm" at 63,23.501 h2
  text "1/0.8 mm" at 63,21.501 h2

## Silkscreen, mask and mechanical layers (free items; w line width, h text height)
Top Solder:
  text "SAMPLE #1" at 7,95.911 h4
  text "SAMPLE #2" at 77,95.911 h4
  text "FOOTPRINTS" at 36.5,95.367 h6
  text "SOLDER" at 41.5,80.367 h6
  text "1.5mm" at 48.5,74.384 h6
  text "2mm" at 50.5,68.339 h6
  text "0.5mm" at 37,64.956 h2
  text "0.4mm" at 48,64.956 h2
  text "0.3mm" at 59,64.956 h2
  text "0.2mm" at 42,51.956 h2
  text "0.1mm" at 53.5,51.956 h2
  text "0.5mm" at 37.5,47.956 h2
  text "0.4mm" at 48.5,47.956 h2
  text "0.3mm" at 59.5,47.956 h2
  text "0.2mm" at 42.5,36.456 h2
  text "0.1mm" at 54,36.456 h2
  text "2/1 mm" at 55.5,29.501 h2
  text "1/0.5 mm" at 55.5,27.501 h2
  text "1/0.6 mm" at 55.5,25.501 h2
  text "1/0.7 mm" at 55.5,23.501 h2
  text "1/0.8 mm" at 55.5,21.501 h2
Bottom Solder:
  text "RESISTANCE" at 63.5,95.367 h6
Mechanical 1:
  lines w0.254: 15,0 15,100 ; 30,0 30,100 ; 70,0 70,100 ; 85,0 85,100
Board Shape:
  the board outline again, w0.254

## Dimensions
37.794,14.842 to 62.041,14.842 on Dimensions
70,100 to 100,100 on Dimensions
0,100 to 30,100 on Dimensions
5.2,86.1 to 24.8,86.1 on Dimensions

## Text inside footprints (layer, text, board x,y; h text height)
Designator6: Bottom Overlay "J30" at 62.678,71.85 h1 r270; Bottom Overlay "J29" at 36.378,71.85 h1 r270